# EAGLE board si514-breakout (EAGLE 8.6.1)
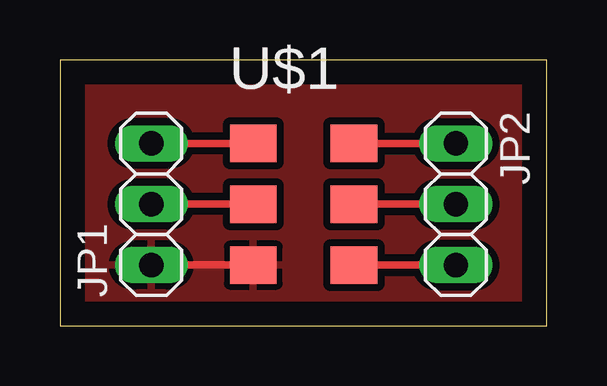
[diagram p0: board, top side]
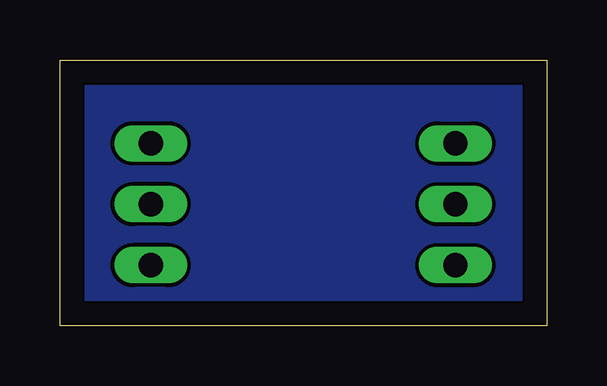
[diagram p1: board, bottom side, seen from below]

Size 20.3 x 11.1 mm. Coordinates in mm from the lower left corner, seen from the top.
Outline: 0,0 20.3,0 20.3,11.1 0,11.1 0,0
Copper layers (1*16): Top 0.035mm / dielectric 1.5mm / Bottom 0.035mm
Design rules "default": minimum track width 6mil, minimum drill 0.35mm, track to track 6mil, track to pad 6mil, pad to pad 6mil, via to via 6mil, smd to smd 6mil, copper to edge 40mil, drill to drill 6mil, minimum pad ring 10mil, minimum via ring 8mil, stop-mask expansion 4mil, vias tented up to drill 0mil, thermal gap 10mil

## Footprints (pad centres in the part's own frame; a part is rotated, then mirrored left to right if it is on the bottom)
1X03 = drill 1.016 long: 1 -2.54,0; 2 0,0; 3 2.54,0
XTAL-6PIN = smd 1.95 x 1.55: P$1 -2.1,2.54; P$2 -2.1,0; P$3 -2.1,-2.54; P$4 2.1,-2.54; P$5 2.1,0; P$6 2.1,2.54

## Placement (x,y rotation side)
JP1  [1X03]  3.81,5.08 90 top
JP2  [1X03]  16.51,5.08 270 top
U$1  SI514  [XTAL-6PIN]  10.16,5.08 0 top

## Library data of the parts
JP1 JP2 = pinhead
U$1 = lupa300-components

## Nets
!CLK: JP2.2 U$1.P$5
CLK: JP2.3 U$1.P$4
GND: JP1.1 U$1.P$3
SCL: JP1.2 U$1.P$2
SDA: JP1.3 U$1.P$1
VDD: JP2.1 U$1.P$6

## Tracks (layer width: path | path; a pad name or v marks a point on that pad's centre or on a via)
!CLK
  Top 0.305: U$1.P$5 JP2.2
CLK
  Top 0.305: U$1.P$4 JP2.3
GND
  Top 0.305: U$1.P$3 JP1.1
  pour Top (isolate 0.305): 0,0 20.32,0 20.32,11.43 0,11.43
N$1
  pour Bottom: 0,11.43 20.32,11.43 20.32,0 0,0
SCL
  Top 0.305: U$1.P$2 JP1.2
SDA
  Top 0.305: U$1.P$1 JP1.3
VDD
  Top 0.305: U$1.P$6 JP2.1